# Altium PCB pcb.v2.PcbDoc
Units mm, origin at the board's own origin, x right, y up, seen from the top; angles counter-clockwise.
Board outline 29 x 27 mm, 4 copper layers (Top Layer, Int1 (GND), Int2 (PWR), Bottom Layer), stack 1.369 mm thick; 27 components, 23 nets, 78 pads, 31 vias.
Unrouted connection lines stored in the file: 22.
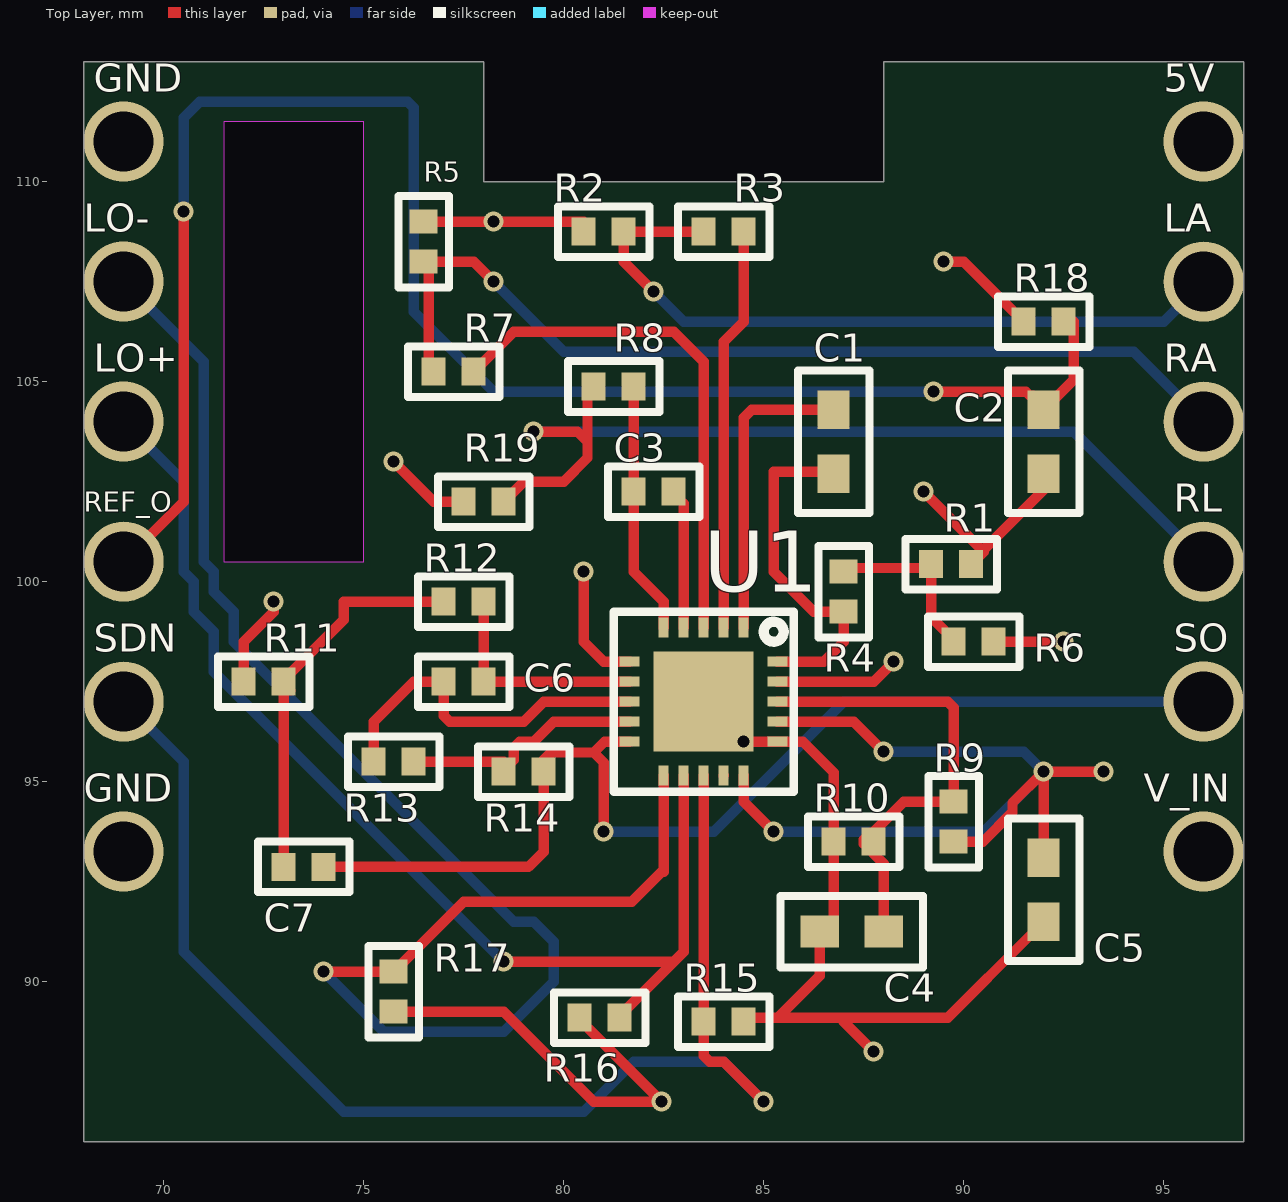
[diagram p0: Top Layer view]
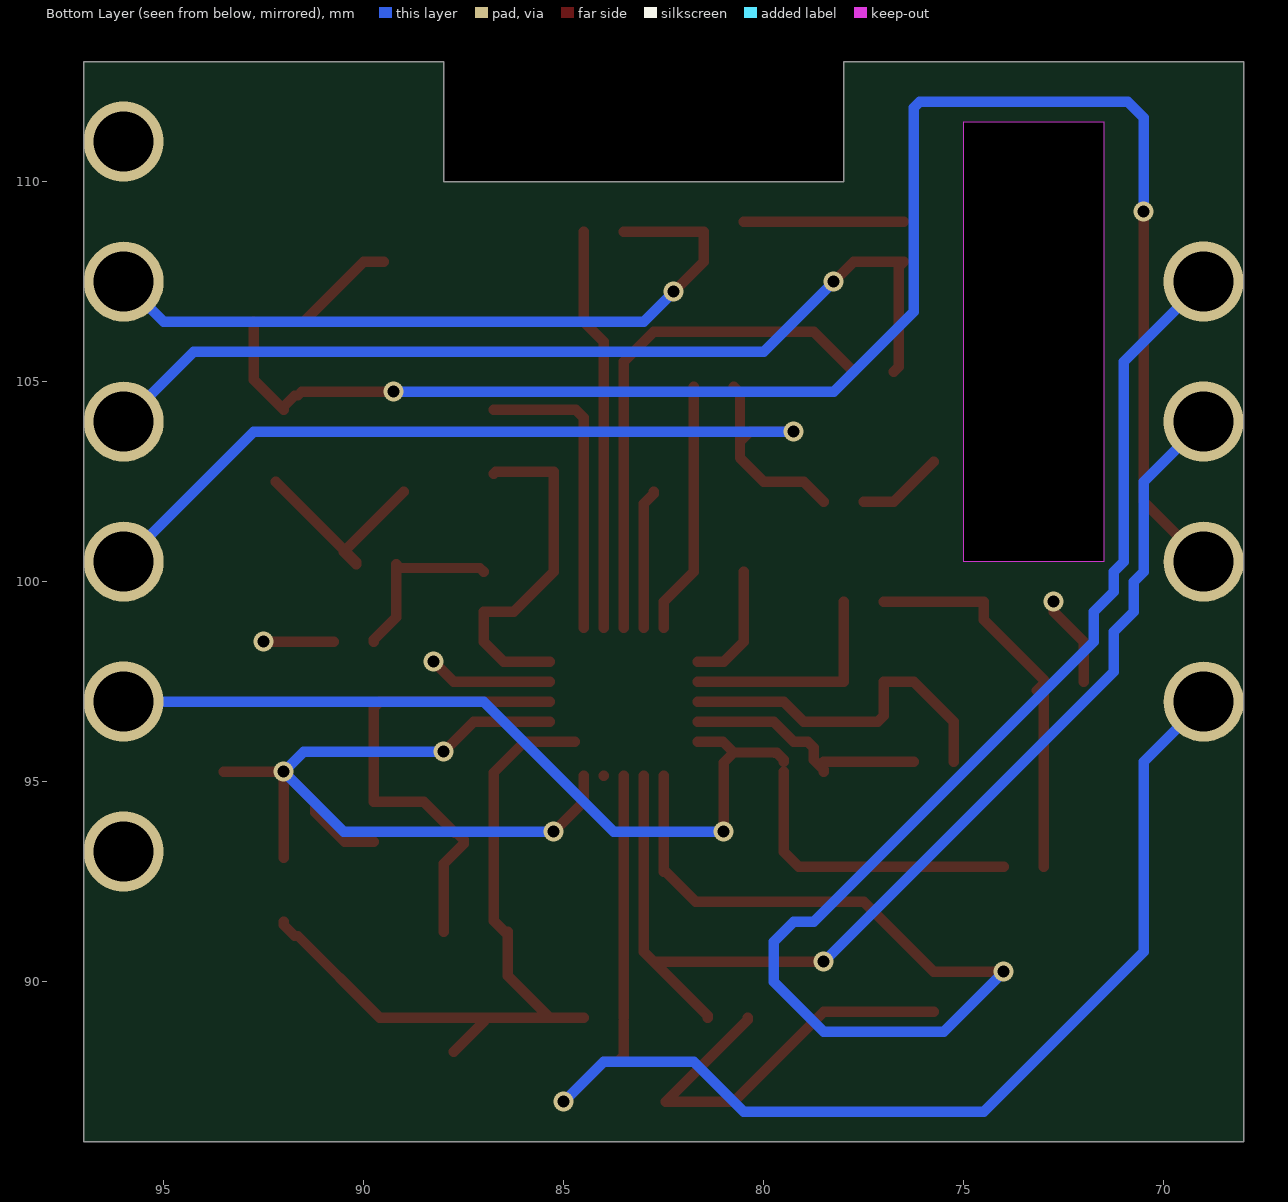
[diagram p1: Bottom Layer view, seen from below]
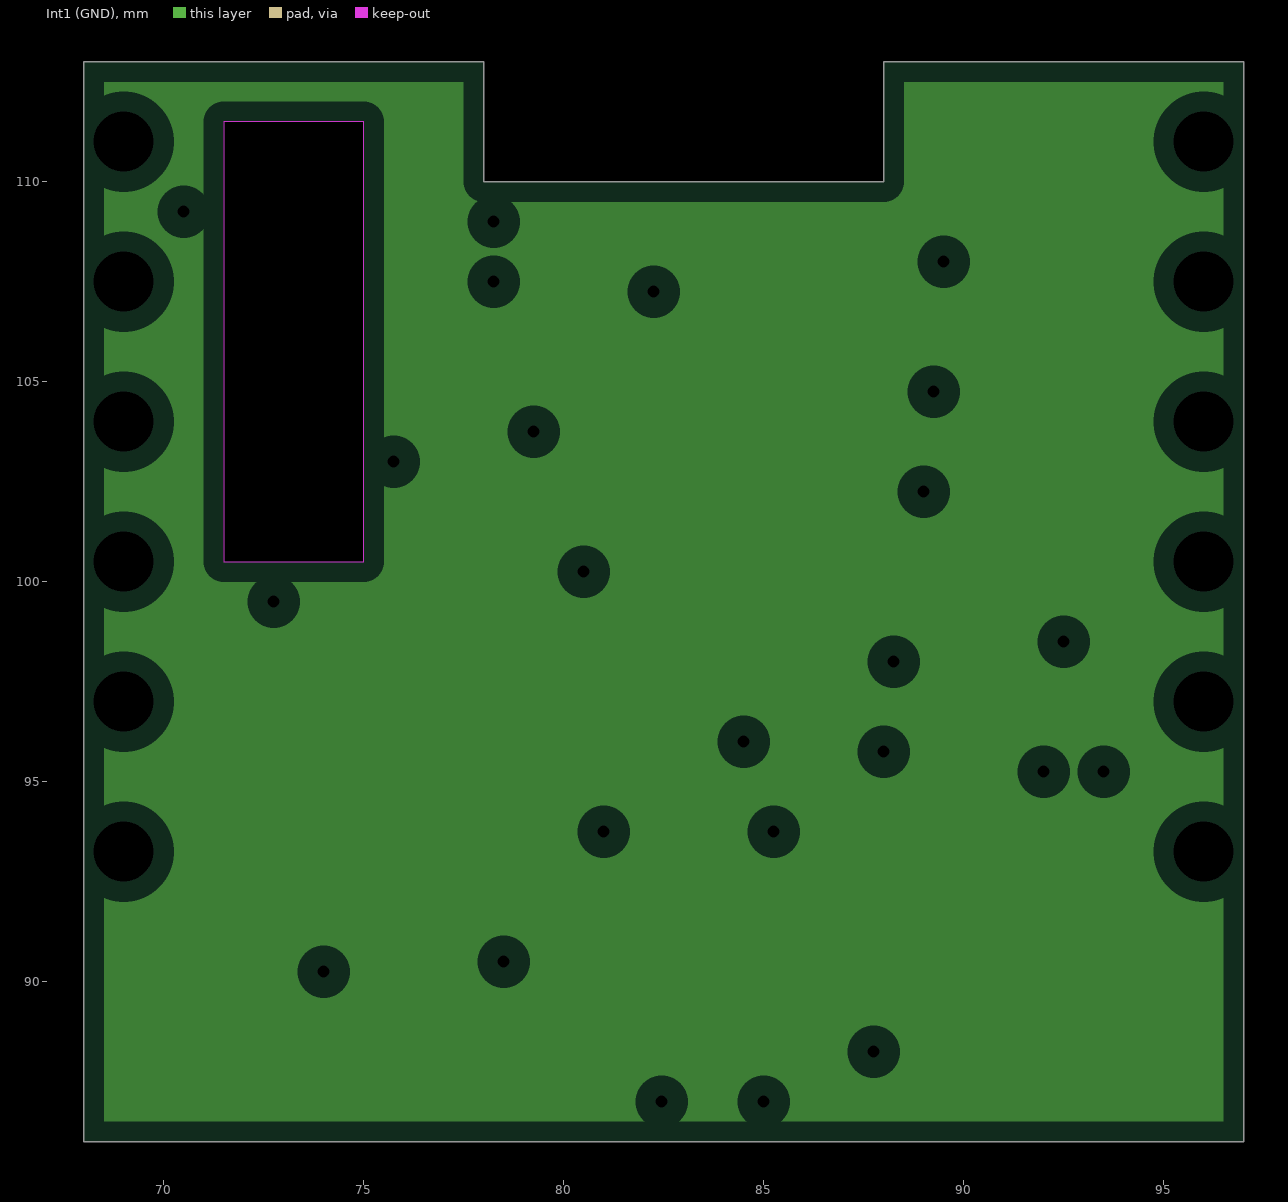
[diagram p2: Int1 (GND), clearances drawn from the general rule]
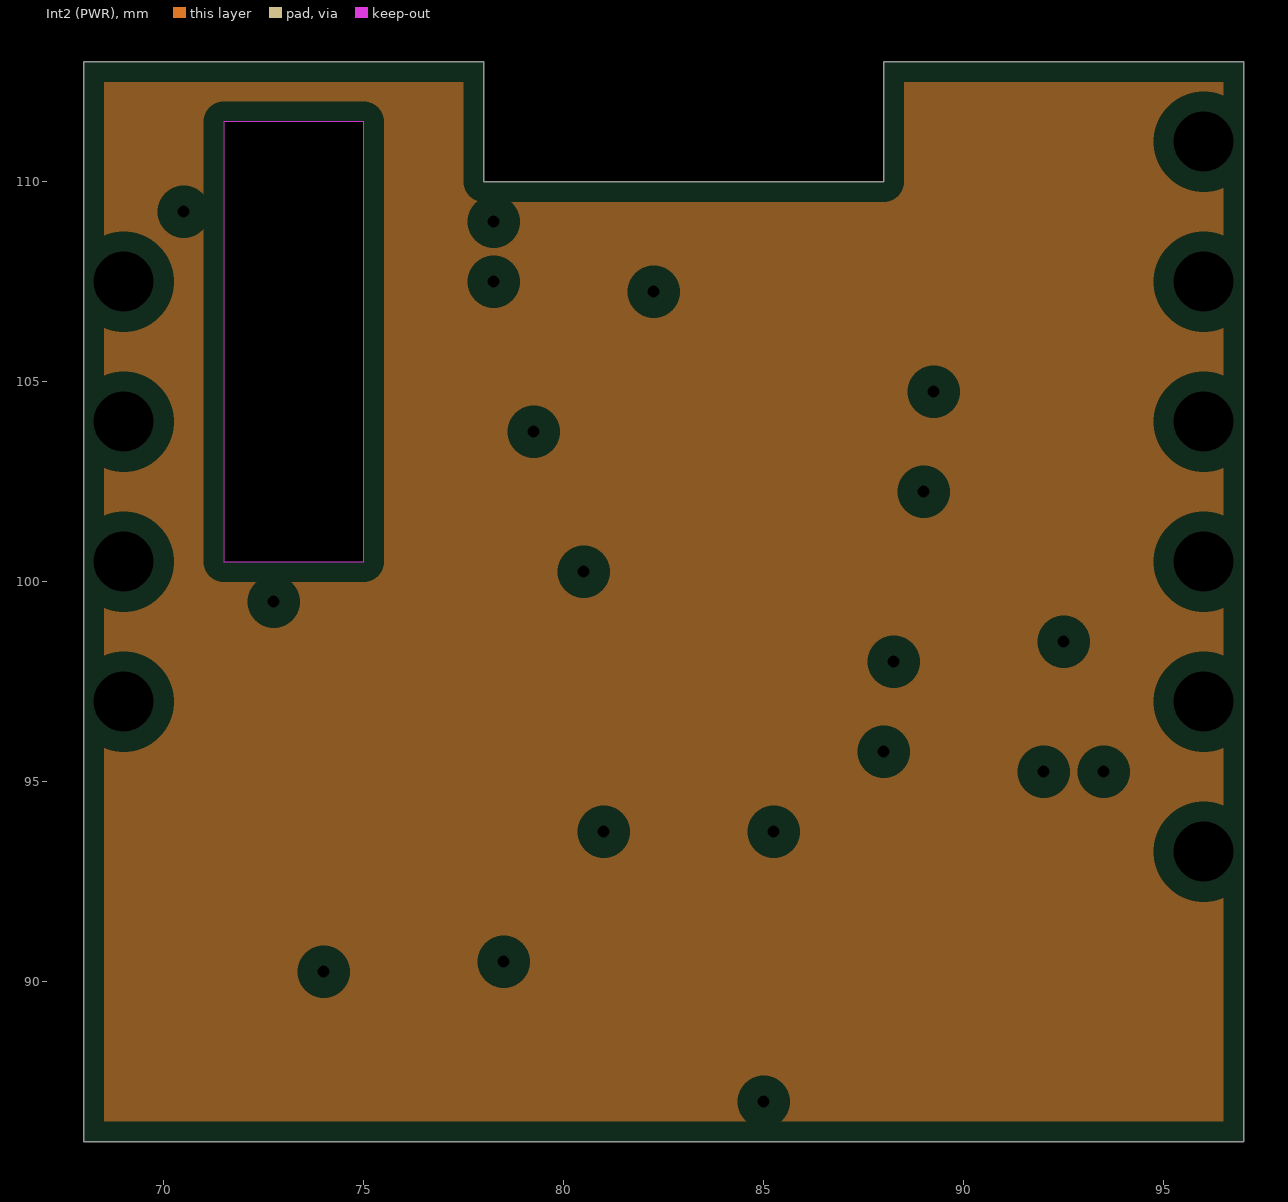
[diagram p3: Int2 (PWR), clearances drawn from the general rule]

## Layer stack, top to bottom
Top Solder: solder mask 0.0254, SM-001, Dk 4
Top Layer: signal copper 0.035
Dielectric 1: prepreg 0.1295, PP-017, Dk 4.3
Dielectric 2: prepreg 0.1295, PP-017, Dk 4.3
Int1 (GND): plane copper 0.035
Dielectric 3: core 0.7112, Core-039, Dk 4.8
Int2 (PWR): plane copper 0.035
Dielectric 4: prepreg 0.1295, PP-017, Dk 4.3
Dielectric 5: prepreg 0.1295, PP-017, Dk 4.3
Bottom Layer: signal copper 0.035
Bottom Solder: solder mask 0.0254, SM-001, Dk 4

## Board outline
97,86 97,113 88,113 88,110 78,110 78,113 68,113 68,86
cut-out: 71.5,100.5 75,100.5 75,111.5 71.5,111.5

## Design rules (kind name [scope] priority, off if disabled: settings)
AssemblyTestPointUsage [All] p1 off:
AssemblyTestpoint [All] p1 off: testpointundercomponent=TRUE minsize=1.016 maxsize=2.54 preferedsize=1.524 minholesize=0 maxholesize=1.016 preferedholesize=0.813 testpointgrid=0.025 usegrid=TRUE gridtolerance=0 allowsidetop=TRUE allowsidebottom=TRUE
Clearance [All] p1 off: gap=0.254 ignorepadtopadclearanceinfootprint=FALSE except(0: Arc-Hole Track-Hole SMDPad-Hole THPad-Hole Via-Hole Fill-Hole Poly-Hole Region-Hole Text-Hole)
DiffPairsRouting [All] p1 off: maxlimit=0.254 minlimit=0.254 mostfreqgap=0.254 toplayer_minwidth=0.381 toplayer_maxwidth=0.381 toplayer_prefwidth=0.381 bottomlayer_minwidth=0.381 bottomlayer_maxwidth=0.381 bottomlayer_prefwidth=0.381 maxuncoupledlength=12.7
FabricationTestPointUsage [All] p1 off: valid=0 allowmultiple=FALSE
FabricationTestpoint [All] p1 off: side=3 testpointundercomponent=TRUE minsize=1.016 maxsize=2.54 preferedsize=1.524 minholesize=0 maxholesize=1.016 preferedholesize=0.813 testpointgrid=0.025 allowsidetop=TRUE allowsidebottom=TRUE usegrid=TRUE gridtolerance=0
FanoutControl Fanout_BGA [IsBGA] p1 off: bgadir=Out bgaviamode=Centered fanoutstyle=Auto fanoutdirection=Alternating viagrid=0.025 // Fanout_BGA (Default Rule)
FanoutControl Fanout_LCC [IsLCC] p2 off: bgadir=Out bgaviamode=Centered fanoutstyle=Auto fanoutdirection=Alternating viagrid=0.025 // Fanout_LCC (Default Rule)
FanoutControl Fanout_SOIC [IsSOIC] p3 off: bgadir=Out bgaviamode=Centered fanoutstyle=Auto fanoutdirection=Alternating viagrid=0.025 // Fanout_SOIC (Default Rule)
FanoutControl Fanout_Small [(CompPinCount < 5)] p4 off: bgadir=Out bgaviamode=Centered fanoutstyle=Auto fanoutdirection=OutThenIn viagrid=0.025 // Fanout_Small (Default Rule)
FanoutControl Fanout_Default [All] p5 off: bgadir=Out bgaviamode=Centered fanoutstyle=Auto fanoutdirection=Alternating viagrid=0.025 // Fanout_Default (Default Rule)
Height [All] p1 off: minheight=0 maxheight=25.4 prefheight=12.7
HoleSize [All] p1 off: absolutevalues=TRUE maxlimit=2.54 minlimit=0.025 maxpercent=80.000 minpercent=20.000
HoleToHoleClearance [All] p1 off: gap=0.254 allowstackedmicrovias=TRUE
LayerPairs [All] p1 off: enforce=TRUE
MinimumSolderMaskSliver [All] p1 off: minsoldermaskwidth=0.254
NetAntennae [All] p1 off: netantennaetolerance=0
PasteMaskExpansion [All] p1 off: expansion=0
PlaneClearance [All] p1 off: clearance=0.508
PlaneConnect [All] p1 off: planeconnectstyle=Relief reliefexpansion=0.508 reliefentries=4 reliefconductorwidth=0.254 reliefairgap=0.254
PolygonConnect [All] p1 off: connectstyle=Relief reliefconductorwidth=0.254 reliefentries=4 polygonreliefangle="90 Angle" airgapwidth=0.254
RoutingCorners [All] p1 off: cornerstyle=45-Degree minsetback=2.54 maxsetback=2.54
RoutingLayers [All] p1 off: top layer_v5=TRUE bottom layer_v5=TRUE
RoutingPriority [All] p1 off: routingpriority=0
RoutingTopology [All] p1 off: topology=Shortest
RoutingVias [All] p1 off: holewidth=0.711 width=1.27 viastyle="Through Hole" minholewidth=0.711 minwidth=1.27 maxholewidth=0.711 maxwidth=1.27
ShortCircuit [All] p1 off: allowed=FALSE
SilkToSilkClearance [All] p1 off: silktosilkclearance=0.254
SilkToSolderMaskClearance [IsPad] p1 off: minsilkscreentomaskgap=0.254 clearancetoexposedcopper=TRUE
SolderMaskExpansion [All] p1 off: expansion=0.102
UnRoutedNet [All] p1 off:
UnpouredPolygon [All] p1 off:
Width [All] p1 off: maxlimit=0.254 minlimit=0.254 preferedwidth=0.254
2 further rules are at their usual default settings.

## Components (designator, comment, footprint, x,y, rotation, side; value= is the part's Value field where it differs from the comment)
C1 "0.33uF" "Cap 0.330uF" 86.75,103.5 r90 top
C2 "0.33uF" "Cap 0.330uF" 92,103.5 r270 top
C3 "1nF" "CAP 1nF" 99.903,176.037 r180 top
C4 "0.1uF" "CAP 0.1uF" -446.2,49.721 r180 top
C5 "0.1uF" "CAP 0.1uF" 133.529,-441.1 r270 top
C6 "10nF" "CAP 10nF" 77.5,97.5 r0 top
C7 "1.5nF" "CAP 1.5nF" 73.5,93 r0 top
R1 "1.4M" "RESISTOR 1.4M" 89.688,100.438 r0 top
R2 "10M" "RESISTOR 10M" 84.175,106.21 r180 top
R3 "180K" "RESISTOR 180K" 84,108.75 r0 top
R4 "10M" "RESISTOR 10M" 84.46,96.575 r90 top
R5 "10M" "RESISTOR 10M" 73.96,105.325 r90 top
R6 "10M" "RESISTOR 10M" 93.425,95.96 r180 top
R7 "180K" "RESISTOR 180K" 77.25,105.25 r0 top
R8 "360K" "RESISTOR 360K" 81.25,104.75 r180 top
R9 "10M" "RESISTOR 10M" 87.21,90.825 r90 top
R10 "10M" "RESISTOR 10M" 84.075,96.04 r0 top
R11 "1M" "RESISTOR 1M" 74.786,95.722 r180 top
R12 "1M" "RESISTOR 1M" 75.214,101.278 r0 top
R13 "100K" "RESISTOR 100K" 75.75,95.5 r180 top
R14 "1M" "RESISTOR 1M" 81.286,93.472 r180 top
R15 "Resistor 100K" "RESISTOR 100K" 84,89 r0 top
R16 "Resistor 100K" "RESISTOR 100K" 80.9,89.1 r0 top
R17 "Resistor 100K" "RESISTOR 100K" 75.75,89.75 r270 top
R18 "Resistor 100K" "RESISTOR 100K" 92,106.5 r0 top
R19 "Resistor 100K" "RESISTOR 100K" 78,102 r0 top
U1 "AD8232" *LFCSP_20_AD8232(Primary) 83.5,97 r270 top

## Footprints (in the part's own frame and the unit in brackets; to place one, negate y for a bottom-side part, rotate by r counter-clockwise, add the part's x,y. Pads: shape width x height; smd on the part's side, far side on the other; paste and mask are expansions set on the pad)
*LFCSP_20_AD8232(Primary) [mm]
  rect 0.5x0.25 smd mask+0.051: 1(-1.85,1) 2(-1.85,0.5) 3(-1.85,0) 4(-1.85,-0.5) 5(-1.85,-1) 11(1.85,-1) 12(1.85,-0.5) 13(1.85,0) 14(1.85,0.5) 15(1.85,1)
  rect 0.25x0.5 smd mask+0.051: 6(-1,-1.85) 7(-0.5,-1.85) 8(0,-1.85) 9(0.5,-1.85) 10(1,-1.85) 16(1,1.85) 17(0.5,1.85) 18(0,1.85) 19(-0.5,1.85) 20(-1,1.85)
  rect 2.5x2.5 smd: PAD(0,0)
  silkscreen extent -2.25,-2.25 2.25,2.25
"CAP 0.1uF" [mm]
  rect 0.965x0.8 smd: 1(-534.2,-41.529) 2(-532.6,-41.529)
  silkscreen extent -535.18,-42.42 -531.62,-40.64
"Cap 0.330uF" [mm]
  rect 0.965x0.8 smd: 1(-0.8,0) 2(0.8,0)
  silkscreen extent -1.78,-0.89 1.78,0.89
"CAP 1.5nF" [mm]
  rect 0.6x0.7 smd: 1(-0.5,-0.127) 2(0.5,-0.127)
  silkscreen extent -1.14,-0.76 1.14,0.51
"CAP 1nF" [mm]
  rect 0.6x0.7 smd: 1(17.153,73.787) 2(18.153,73.787)
  silkscreen extent 16.51,73.15 18.8,74.42
"CAP 10nF" [mm]
  rect 0.6x0.7 smd: 1(-0.5,0) 2(0.5,0)
  silkscreen extent -1.14,-0.64 1.14,0.64
"RESISTOR 1.4M" [mm]
  rect 0.6x0.7 smd: 1(-0.5,0) 2(0.5,0)
  silkscreen extent -1.14,-0.64 1.14,0.64
"RESISTOR 1M" [mm]
  rect 0.6x0.7 smd: 1(1.786,-1.778) 2(2.786,-1.778)
  silkscreen extent 1.14,-2.41 3.43,-1.14
"RESISTOR 10M" [mm]
  rect 0.6x0.7 smd: 1(2.675,-2.54) 2(3.675,-2.54)
  silkscreen extent 2.03,-3.17 4.32,-1.9
"RESISTOR 100K" [mm]
  rect 0.6x0.7 smd: 1(-0.5,0) 2(0.5,0)
  silkscreen extent -1.14,-0.64 1.14,0.64
"RESISTOR 180K" [mm]
  rect 0.6x0.7 smd: 1(-0.5,0) 2(0.5,0)
  silkscreen extent -1.14,-0.64 1.14,0.64
"RESISTOR 360K" [mm]
  rect 0.6x0.7 smd: 1(-0.5,-0.127) 2(0.5,-0.127)
  silkscreen extent -1.14,-0.76 1.14,0.51

## Part data
C1 C2: library part "Cap 0.33uF"
C3: library part "Cap 1nF"
C4 C5: library part "Cap 0.1uF"
C6: library part "Cap 10nF"
C7: library part "Cap 1.5nF"
R1: library part "Resistor 1.4M"
R2 R4 R5 R6 R9 R10: library part "Resistor 10M"
R3 R7: library part "Resistor 180K"
R8: library part "Resistor 360K"
R11 R12 R14: library part "Resistor 1M"
R13: library part "Resistor 100K"
U1: "ECG Front End 20-LFCSP-WQ _4x4_", Package="LFCSP-20 Analog Devices", Availability=Unavailable, MF="Analog Devices", MP=AD8232, Price=None, SnapEDA_Link=https://www.snapeda.com/parts/AD8232/Analog%20Devices/view-part/4218063/?ref=snap

## Free pads (board coordinates)
  round 2 hole 1.5: 1(69,97) 1(69,100.5) 1(96,100.5) 1(96,104) 1(96,107.5)

## Via types
v1: diameter 0.5, hole 0.3, Top Layer to Bottom Layer, 15 vias
v2: diameter 0.5, hole 0.3, Top Layer to Int1 (GND), 5 vias
v3: diameter 2, hole 1.5, Top Layer to Bottom Layer, 5 vias
v4: diameter 0.5, hole 0.3, Top Layer to Int2 (PWR), 4 vias
v5: diameter 2, hole 1.5, Top Layer to Int1 (GND), 2 vias

## Nets (pads, with @x,y where several pads share a name; then routed paths per layer and width w, separated by ;. In a path a pad name is that pad's centre, name@x,y a point inside that pad or via, vN(x,y) a via of type N, cw(c..) or ccw(c..) an arc to the next point about the centre after c; other vN are vias at no path point)
3.3V: C2.2 C5.1 R1.2 R2.2 R5.2 R9.1 U1.6 U1.15 U1.17 | length 35.6
  Top Layer w0.254: R5.2 v4(78.25,109) R2.2@80.5,109 ; v4(80.5,100.25) 80.5,98.5 81,98 U1.6 ; U1.15 84.5,94.5 v1(85.25,93.75) ; U1.17 87.25,96.5 v1(88,95.75) ; v4(89,102.25) R1.2@90.475,100.775 ; R9.1 90.481,93.5 91.217,94.236 91.217,94.467 v1(92,95.25) ; C5.1 v1(92,95.25) ; C2.2@92.2,102.5 R1.2@90.475,100.775 ; v4(93.5,95.25) v1(92,95.25) ; R1.2@90.475,100.775 90.5,100.75 R1.2 90.188,100.488 R1.2@90.475,100.775
  Bottom Layer w0.254: v1(85.25,93.75) 90.5,93.75 v1(92,95.25) 91.5,95.75 v1(88,95.75)
GND: C4.2 C5.2 R10.1 R15.2 R16.1 R17.2 R18.1 R19.1 U1.14 U1.16 U1.PAD | length 34.2
  Top Layer w0.254: R17.2 78.5,89.25 80.75,87 v2(82.45,87) 80.4,89.05 R16.1 ; v2(75.75,103) 76.75,102 R19.1 ; U1.14 U1.14@84.006,95.156 ; R15.2@84.5,89.1 85.35,89.1 ; U1.PAD@84.719,96 U1.16 85.981,96 86.75,95.231 R10.1 86.75,91.523 86.477,91.25 C4.2 86.4,90.15 85.35,89.1 ; v2(87.75,88.25) 87,89 87,89.1 ; v2(89.5,108) 90,108 R18.1 ; C5.2 92,91.417 91.727,91.144 91.645,91.144 89.6,89.1 87,89.1 ; 85.35,89.1 87,89.1
  other v2: 84.5,96
  other v5: 69,93.25 69,111
NetC1_1: C1.1 R4.1 U1.20 | length 8.8
  Top Layer w0.254: U1.20 86.5,98 87,98.5 R4.1 86.25,99.25 85.25,100.25 85.25,102.75 86.7,102.75 C1.1
NetC1_2: C1.2 U1.1 | length 7.6
  Top Layer w0.254: U1.1 84.5,104.101 84.699,104.3 C1.2
NetC2_1: C2.1 pad.1@69,100.5 R18.2 | length 42.1
  Top Layer w0.254: pad.1@69,100.5 70.5,102 v1(70.5,109.25) ; v1(89.25,104.75) 91.55,104.75 91.644,104.655 91.727,104.655 92,104.382 C2.1 92.75,105.05 R18.2@92.75,106.5
  Bottom Layer w0.254: v1(70.5,109.25) 70.5,111.601 70.899,112 76.101,112 76.25,111.851 76.25,106.75 78.25,104.75 v1(89.25,104.75)
NetC3_1: C3.1 U1.4 | length 3.5
  Top Layer w0.254: C3.1 82.75,102.2 83,101.95 U1.4
NetC3_2: C3.2 R8.1 U1.5 | length 6.3
  Top Layer w0.254: R8.1 C3.2 81.75,100.25 82.5,99.5 U1.5
NetC4_1: C4.1 R9.2 R10.2 U1.18 | length 12
  Top Layer w0.254: U1.18 89.601,97 89.75,96.851 R9.2 88.5,94.5 87.723,93.723 87.673,93.723 87.5,93.55 87.5,93.5 87.5,93.45 88,92.95 C4.1
NetC6_1: C6.1 R13.2 U1.8 | length 8.9
  Top Layer w0.254: R13.2 75.25,96.5 76.25,97.5 C6.1 77,96.649 77.149,96.5 79,96.5 79.5,97 U1.8
NetC6_2: C6.2 R12.2 U1.7 | length 5.7
  Top Layer w0.254: R12.2 C6.2 U1.7
NetC7_1: C7.1 R11.1 R12.1 | length 10
  Top Layer w0.254: C7.1 R11.1@73,97.45 ; R11.1@73.173,97.277 R11.1@73,97.45 ; R12.1 74.5,99.5 74.5,99.05 73,97.55 R11.1 R11.1@73,97.45
NetC7_2: C7.2 R14.1 U1.10 | length 28.5
  Top Layer w0.254: C7.2 79.123,92.873 79.5,93.25 R14.1 ; R14.1@79.5,95.5 79.5,95.55 79.673,95.723 79.723,95.723 79.731,95.731 80.75,95.731 ; v1(81,93.75) 81,95.481 80.75,95.731 ; U1.10 81.019,96 80.75,95.731
  Bottom Layer w0.254: v1(81,93.75) 83.75,93.75 87,97 v3(96,97)
NetR1_1: R1.1 R4.2 R6.2 | length 4.4
  Top Layer w0.254: R4.2 87.094,100.344 89.094,100.344 R1.1 89.188,99.113 89.75,98.55 R6.2
NetR2_1: pad.1@96,107.5 R2.1 R3.1 | length 18.3
  Top Layer w0.254: v1(82.25,107.25) 81.5,108 R2.1 R3.1
  Bottom Layer w0.254: v1(82.25,107.25) 83,106.5 95,106.5 pad.1@96,107.5
NetR3_2: R3.2 U1.2 | length 10.1
  Top Layer w0.254: U1.2 84,106 84.5,106.5 R3.2
NetR5_1: pad.1@96,104 R5.1 R7.1 | length 24
  Top Layer w0.254: R7.1 76.625,105.375 76.625,107.875 R5.1 77.75,108 v1(78.25,107.5)
  Bottom Layer w0.254: v1(78.25,107.5) 80,105.75 94.25,105.75 pad.1@96,104
NetR6_1: R6.1 R11.2 U1.19 | length 7.2
  Top Layer w0.254: R11.2 72,98.5 72.75,99.25 v1(72.75,99.5) ; U1.19 87.75,97.5 v1(88.25,98) ; R6.1 v1(92.5,98.5)
NetR7_2: R7.2 U1.3 | length 13.1
  Top Layer w0.254: R7.2 78.75,106.25 82.75,106.25 83.5,105.5 U1.3
NetR8_2: pad.1@96,100.5 R8.2 R19.2 | length 24
  Top Layer w0.254: R19.2 79,102.5 80,102.5 80.596,103.096 80.596,103.5 ; v1(79.25,103.75) 80.346,103.75 80.596,103.5 ; R8.2@80.75,104.827 R8.2 80.596,104.723 80.596,103.5
  Bottom Layer w0.254: v1(79.25,103.75) 92.75,103.75 pad.1@96,100.5
NetR13_1: R13.1 R14.2 U1.9 | length 6.1
  Top Layer w0.254: R13.1 R14.2@78.5,95.5 ; R14.2 78.5,95.3 78.75,95.55 78.75,95.851 78.899,96 79.25,96 79.75,96.5 U1.9
NetR15_1: pad.1@69,97 R15.1 U1.13 | length 32.8
  Top Layer w0.254: R15.1 83.5,88.149 83.649,88 84,88 v1(85,87) ; R15.1@83.5,89.1 U1.13
  Bottom Layer w0.254: pad.1@69,97 70.5,95.5 70.5,90.75 74.5,86.75 80.5,86.75 81.75,88 84,88 v1(85,87)
NetR16_2: R16.2 U1.12 | length 28.4
  Top Layer w0.254: v1(78.5,90.5) 82.75,90.5 ; R16.2 81.4,89.15 82.75,90.5 ; U1.12 83,90.75 82.75,90.5
  Bottom Layer w0.254: v3(69,104) 70.5,102.5 70.5,100.25 70.75,100 70.75,99.25 71.25,98.75 71.25,97.75 v1(78.5,90.5)
NetR17_1: R17.1 U1.11 | length 41.1
  Top Layer w0.254: v1(74,90.25) R17.1 77.5,92 81.7,92 82.45,92.75 82.5,92.75 U1.11
  Bottom Layer w0.254: v3(69,107.5) 71,105.5 71,100.5 71.25,100.25 71.25,99.75 71.75,99.25 71.75,98.5 78.75,91.5 79.25,91.5 79.75,91 79.75,90 78.5,88.75 75.5,88.75 v1(74,90.25)
copper on no net:
  other v3: 96,93.25 96,111

## Polygon pours and split planes (outlines as drawn)
no net on Int1 (GND) (split plane): 96.49,86.51 68.51,86.51 68.51,112.49 77.49,112.49 77.49,110 77.499,109.9 77.528,109.805 77.576,109.716 77.639,109.639 77.716,109.576 77.805,109.528 77.9,109.499 78,109.49 88,109.49 88.1,109.499 88.195,109.528 88.284,109.576 88.361,109.639 88.424,109.716 88.472,109.805 88.501,109.9 88.51,110 88.51,112.49 96.49,112.49
no net on Int2 (PWR) (split plane): 96.49,86.51 68.51,86.51 68.51,112.49 77.49,112.49 77.49,110 77.499,109.9 77.528,109.805 77.576,109.716 77.639,109.639 77.716,109.576 77.805,109.528 77.9,109.499 78,109.49 88,109.49 88.1,109.499 88.195,109.528 88.284,109.576 88.361,109.639 88.424,109.716 88.472,109.805 88.501,109.9 88.51,110 88.51,112.49 96.49,112.49

## Silkscreen, mask and mechanical layers (free items; w line width, h text height)
Top Overlay:
  circle w0.254: c85.25,98.75 r0.25
  text "GND" at 68.25,112.25 h0.7
  text "5V" at 95,112.25 h0.7
  text "LO-" at 68,108.75 h0.7
  text "LA" at 95,108.75 h0.7
  text "LO+" at 68.25,105.25 h0.7
  text "RA" at 95,105.25 h0.7
  text "REF_O" at 68,101.75 h0.5
  text "RL" at 95.25,101.75 h0.7
  text "SDN" at 68.25,98.25 h0.7
  text "SO" at 95.25,98.25 h0.7
  text "GND" at 68,94.5 h0.7
  text "V_IN" at 94.5,94.5 h0.7
Mechanical 1:
  circle w0.254: c85.25,98.75 r0.25
  lines w0.254: 81.25,94.75 81.25,99.25 85.75,99.25 85.75,94.75 81.25,94.75
  text "U1" at 84.75,95 h0.2